# Altium PCB SlotCarControllerRev0.PcbDoc
Units mm, origin at the board's own origin, x right, y up, seen from the top; angles counter-clockwise.
Board outline 106.68 x 67.31 mm, 2 copper layers (Top Layer, Bottom Layer); 56 components, 63 nets, 209 pads, 24 vias.
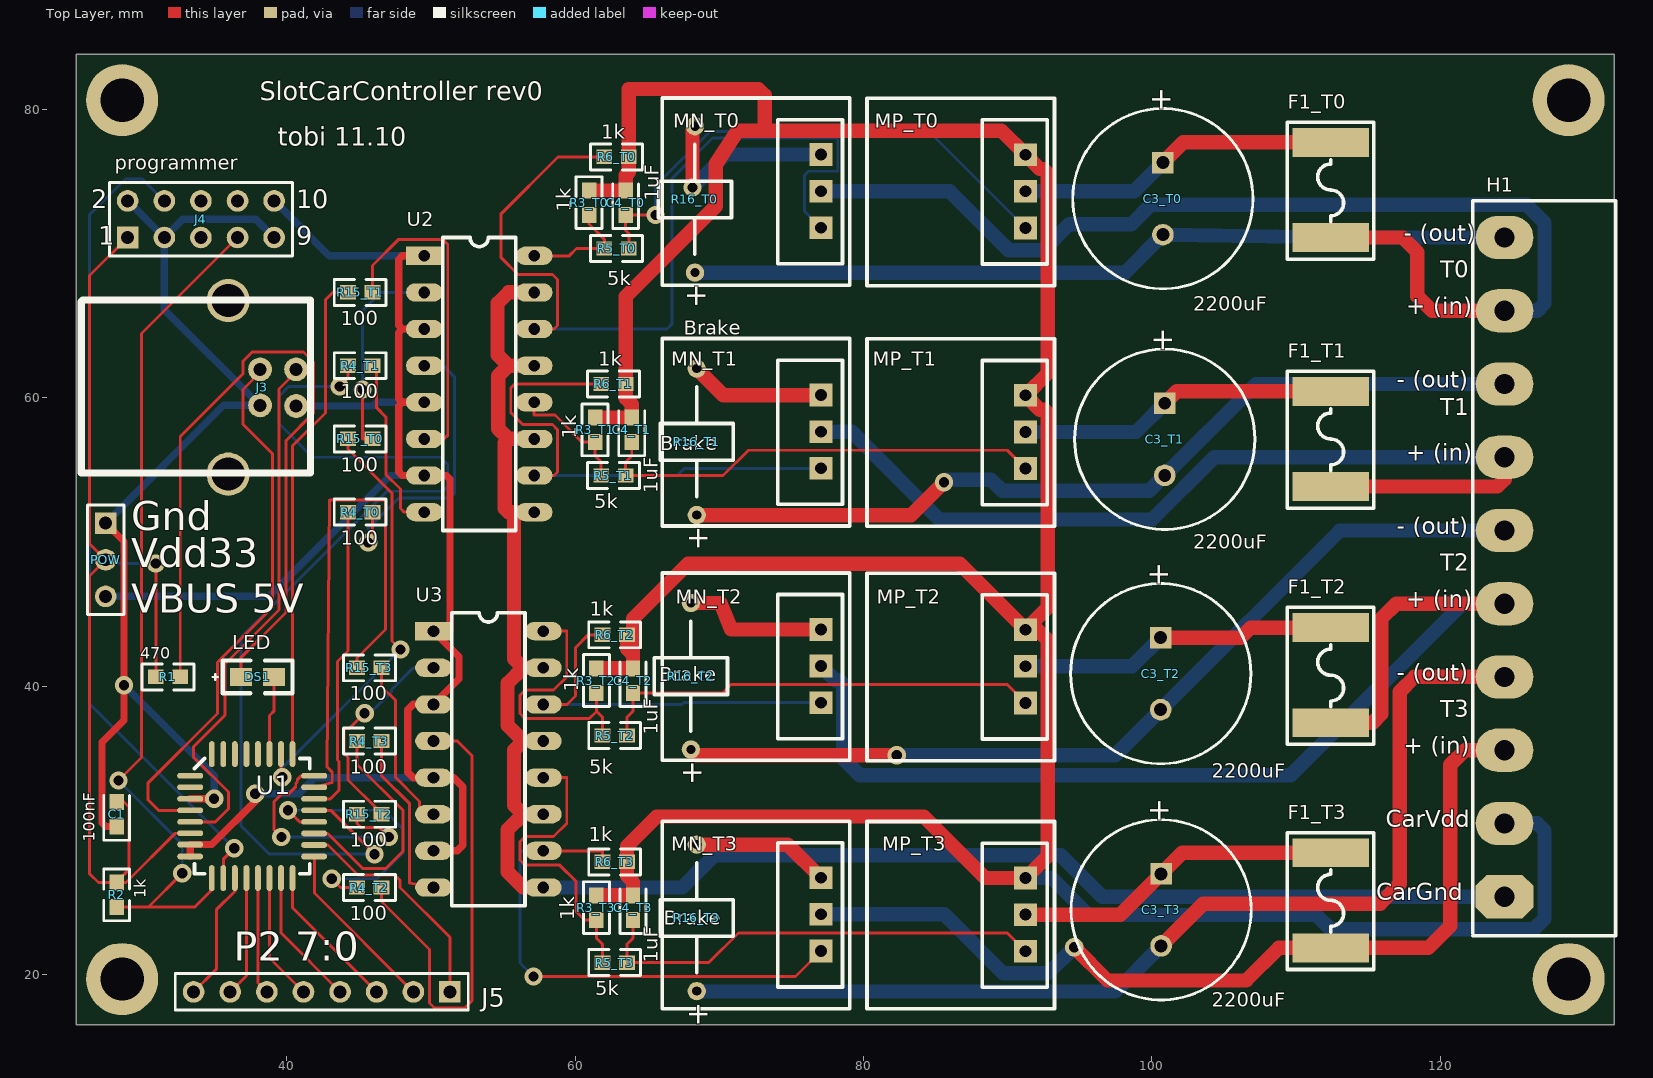
[diagram p0: Top Layer view]
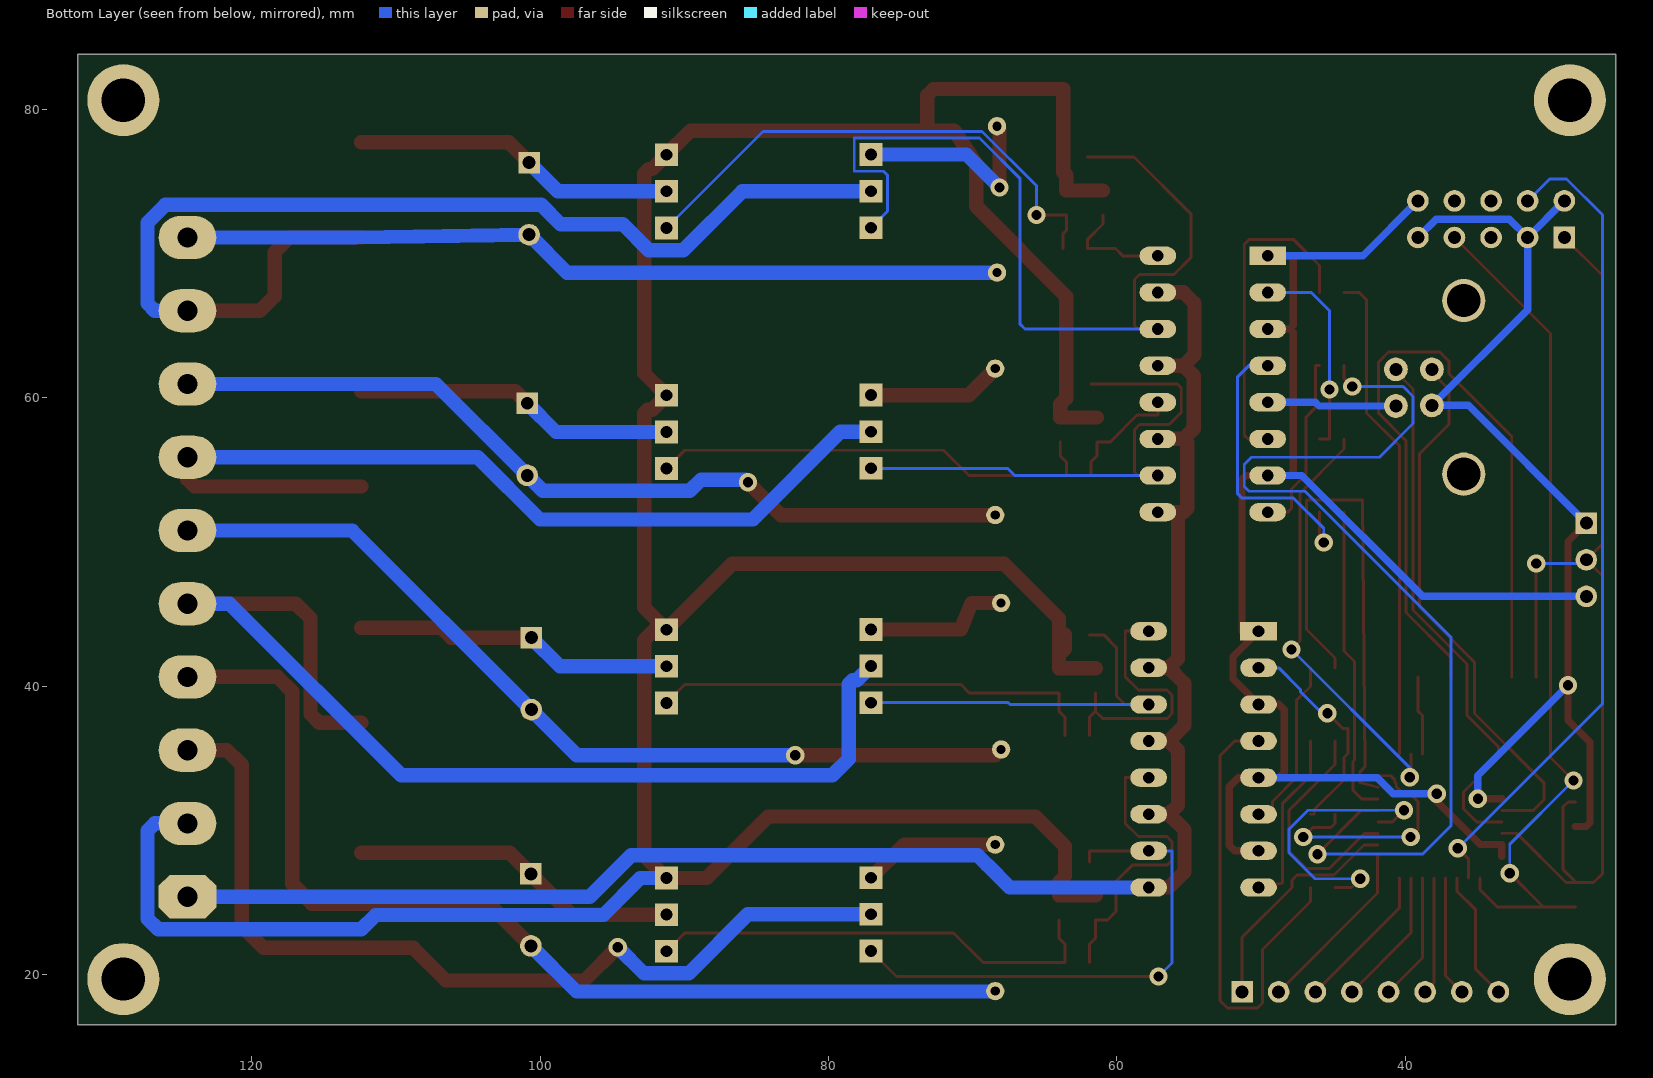
[diagram p1: Bottom Layer view, seen from below]

## Layer stack, top to bottom
Top Layer: signal copper 0.0356
Dielectric: dielectric 0.32, FR-4, Dk 4.8
Bottom Layer: signal copper 0.0356

## Board outline
25.4,16.51 25.4,83.82 132.08,83.82 132.08,16.51

## Design rules (kind name [scope] priority, off if disabled: settings)
Clearance [All] p1: gap=0.254
ComponentClearance ComponentClearance_1 [All vs (HasFootprint('TO220_HEATSINK'))] p1: gap=-999 collisioncheckmode=3 verticalgap=0.254 showdistances=TRUE
ComponentClearance [All] p2: gap=0.254 collisioncheckmode=3 verticalgap=2540 showdistances=TRUE
DiffPairsRouting "Schematic Differential Pairs Routing" [InNet('USBD_P')] p1: maxlimit=0.254 minlimit=0.254 mostfreqgap=0.254 maxuncoupledlength=12.7
DiffPairsRouting [All] p2: maxlimit=0.254 minlimit=0.254 mostfreqgap=0.254 maxuncoupledlength=12.7
Height [All] p1 off: minheight=0 maxheight=25.4 prefheight=12.7
HoleSize [All] p1: absolutevalues=TRUE maxlimit=3 minlimit=0.025 maxpercent=80.000 minpercent=20.000
PolygonConnect [All] p1: connectstyle=Relief reliefconductorwidth=0.254 reliefentries=4 polygonreliefangle="90 Angle"
RoomDefinition RoomDefinition_4 [InComponentClass('T3')] p1 off: confinementstyle=ConfineIn formatcopy=TRUE lockcomponents=FALSE outline 65.024,13.589 121.793,13.589 121.793,27.559 65.024,27.559
RoomDefinition RoomDefinition_3 [InComponentClass('T2') vs False] p2 off: confinementstyle=ConfineIn formatcopy=TRUE lockcomponents=FALSE outline 65.024,31.115 121.793,31.115 121.793,45.085 65.024,45.085
RoomDefinition RoomDefinition_2 [InComponentClass('T1') vs False] p3 off: confinementstyle=ConfineIn formatcopy=TRUE lockcomponents=FALSE outline 66.675,50.419 123.444,50.419 123.444,64.389 66.675,64.389
RoomDefinition RoomDefinition_1 [InComponentClass('T1') vs False] p4 off: confinementstyle=ConfineIn formatcopy=TRUE lockcomponents=FALSE outline 65.024,50.44 121.793,50.44 121.793,64.41 65.024,64.41
RoomDefinition [InComponentClass('T0') vs False] p5 off: confinementstyle=ConfineIn formatcopy=TRUE lockcomponents=FALSE outline 64.643,68.072 121.412,68.072 121.412,82.042 64.643,82.042
RoutingVias [All] p1: holewidth=0.711 width=1.27 viastyle="Through Hole" minholewidth=0.711 minwidth=1.27 maxholewidth=0.711 maxwidth=1.27
SMDNeckDown SMDNeckDown_2 [InNet('GND')] p1: percent=200.000
SMDNeckDown SMDNeckDown_1 [InNet('VBUS')] p2: percent=200.000
SMDNeckDown [All] p3 off: percent=80.000
SilkscreenOverComponentPads [All] p1: minsilkscreentomaskgap=0.254
SolderMaskExpansion [All] p1: expansion=0.102
TestPointUsage [All] p1: valid=0 allowmultiple=FALSE
Testpoint [All] p1: side=15 testpointundercomponent=TRUE minsize=1.016 maxsize=2.54 preferedsize=1.524 minholesize=0 maxholesize=1.016 preferedholesize=0.813 testpointgrid=0.025 style=1023 order=0123456789
Width track [(InNetClass('track'))] p1: maxlimit=2 minlimit=0.254 preferedwidth=1 // width of track side wires
Width "Schematic Width Constraint" [InNet('VBUS')] p2: maxlimit=1.524 minlimit=0.254 preferedwidth=0.508
Width "Schematic Width Constraint_1" [InNet('GND')] p3: maxlimit=1.524 minlimit=0.254 preferedwidth=0.508
Width [All] p4: maxlimit=0.254 minlimit=0.203 preferedwidth=0.254 toplayer_maxwidth=0.203 toplayer_prefwidth=0.203 bottomlayer_maxwidth=0.203 bottomlayer_prefwidth=0.203 minimp=50.000000 maximp=50.000000 favimp=50.000000
19 further rules are at their usual default settings.

## Classes and differential pairs
net class track: CARGND CARGND_T0 CARGND_T1 CARGND_T2 CARGND_T3 CARVDD NetC3_T0_1 NetC3_T1_1 NetC3_T2_1 NetC3_T3_1 NetMN_T0_3 NetMN_T1_3 NetMN_T2_3 NetMN_T3_3 TRACK+0 TRACK+1 TRACK+2 TRACK+3
component class SlotCarControllerRev0: C1 DS1 F? H1 J3 J4 J5 POW R1 R2 U1 U2 U3
component class T3: C3_T3 C4_T3 F1_T3 MN_T3 MP_T3 R3_T3 R4_T3 R5_T3 R6_T3 R15_T3 R16_T3
component class T1: C3_T1 C4_T1 F1_T1 MN_T1 MP_T1 R3_T1 R4_T1 R5_T1 R6_T1 R15_T1 R16_T1
component class T2: C3_T2 C4_T2 F1_T2 MN_T2 MP_T2 R3_T2 R4_T2 R5_T2 R6_T2 R15_T2 R16_T2
component class T0: C3_T0 C4_T0 F1_T0 MN_T0 MP_T0 R3_T0 R4_T0 R5_T0 R6_T0 R15_T0 R16_T0
channel class SlotCarChannel: T0 T1 T2 T3
differential pair USBD: +USBD_P -USBD_N

## Components (designator, comment, footprint, x,y, rotation, side; value= is the part's Value field where it differs from the comment)
C1 "100nF" CC1608-0603 28.194,31.115 r90 top
C3_T0 "2200uF" CAPPR5-12.5x35 100.762,73.812 r270 top (schematic designator C3)
C3_T1 "2200uF" CAPPR5-12.5x35 100.889,57.125 r270 top (schematic designator C3)
C3_T2 "2200uF" CAPPR5-12.5x35 100.609,40.869 r270 top (schematic designator C3)
C3_T3 "2200uF" CAPPR5-12.5x35 100.635,24.486 r270 top (schematic designator C3)
C4_T0 "1uF" CC1608-0603 63.5,73.533 r90 top (schematic designator C4)
C4_T1 "1uF" CC1608-0603 63.92,57.785 r90 top (schematic designator C4)
C4_T2 "1uF" CC1608-0603 64.008,40.386 r90 top (schematic designator C4)
C4_T3 "1uF" CC1608-0603 64.008,24.638 r90 top (schematic designator C4)
DS1 "LED" 0805LED 36.83,40.64 r0 top
F1_T0 "2A" 2920Littelfuse 112.395,71.12 r90 top (schematic designator F1)
F1_T1 "2A" 2920Littelfuse 112.395,53.848 r90 top (schematic designator F1)
F1_T2 "2A" 2920Littelfuse 112.395,37.465 r90 top (schematic designator F1)
F1_T3 "2A" 2920Littelfuse 112.395,21.844 r90 top (schematic designator F1)
H1 "Header 10H" SL508/10/90 124.46,25.4 r90 top
J3 "USB B" usb 40.64,61.976 r270 top
J4 "Debug" HDR2X5 28.956,71.12 r0 top
J5 "Port2" HDR1X8 51.308,18.796 r180 top
MN_T0 "7334" TO220_HEATSINK 77.043,71.797 r90 top (schematic designator MN)
MN_T1 "7334" TO220_HEATSINK 77.043,55.11 r90 top (schematic designator MN)
MN_T2 "7334" TO220_HEATSINK 77.043,38.854 r90 top (schematic designator MN)
MN_T3 "7334" TO220_HEATSINK 77.043,21.632 r90 top (schematic designator MN)
MP_T0 "MOSFET-P GDS" TO220_HEATSINK 91.237,71.78 r90 top (schematic designator MP)
MP_T1 "MOSFET-P GDS" TO220_HEATSINK 91.237,55.093 r90 top (schematic designator MP)
MP_T2 "MOSFET-P GDS" TO220_HEATSINK 91.237,38.837 r90 top (schematic designator MP)
MP_T3 "MOSFET-P GDS" TO220_HEATSINK 91.237,21.615 r90 top (schematic designator MP)
POW "POW" HDR1X3 27.432,51.308 r270 top
R1 "470" CR1608-0603 31.75,40.64 r0 top
R2 "1k" CR1608-0603 28.194,25.527 r270 top
R3_T0 "1k" CR1608-0603 60.96,73.533 r270 top (schematic designator R3)
R3_T1 "1k" CR1608-0603 61.38,57.785 r270 top (schematic designator R3)
R3_T2 "1k" CR1608-0603 61.468,40.386 r270 top (schematic designator R3)
R3_T3 "1k" CR1608-0603 61.468,24.638 r270 top (schematic designator R3)
R4_T0 "100" CR1608-0603 45.085,52.07 r0 top (schematic designator R4)
R4_T1 "100" CR1608-0603 45.085,62.23 r0 top (schematic designator R4)
R4_T2 "100" CR1608-0603 45.72,26.035 r0 top (schematic designator R4)
R4_T3 "100" CR1608-0603 45.72,36.195 r0 top (schematic designator R4)
R5_T0 "5k" CR1608-0603 62.865,70.358 r180 top (schematic designator R5)
R5_T1 "5k" CR1608-0603 62.65,54.61 r180 top (schematic designator R5)
R5_T2 "5k" CR1608-0603 62.738,36.576 r180 top (schematic designator R5)
R5_T3 "5k" CR1608-0603 62.738,20.828 r180 top (schematic designator R5)
R6_T0 "1k" CR1608-0603 62.865,76.708 r180 top (schematic designator R6)
R6_T1 "1k" CR1608-0603 62.65,60.96 r180 top (schematic designator R6)
R6_T2 "1k" CR1608-0603 62.738,43.561 r180 top (schematic designator R6)
R6_T3 "1k" CR1608-0603 62.738,27.813 r180 top (schematic designator R6)
R15_T0 "100" CR1608-0603 45.085,57.15 r0 top (schematic designator R15)
R15_T1 "100" CR1608-0603 45.085,67.31 r0 top (schematic designator R15)
R15_T2 "100" CR1608-0603 45.72,31.115 r0 top (schematic designator R15)
R15_T3 "100" CR1608-0603 45.72,41.275 r0 top (schematic designator R15)
R16_T0 "Brake" "Axial 0.4" 68.301,68.682 r90 top (schematic designator R16)
R16_T1 "Brake" "Axial 0.4" 68.428,51.867 r90 top (schematic designator R16)
R16_T2 "Brake" "Axial 0.4" 68.021,35.611 r90 top (schematic designator R16)
R16_T3 "Brake" "Axial 0.4" 68.428,18.847 r90 top (schematic designator R16)
U1 "C8051F320" TQFP32 37.592,30.988 r0 top
U2 "ACPL847" DIP16 49.53,69.85 r0 top
U3 "ACPL847" DIP16 50.165,43.815 r0 top

## Footprints (in the part's own frame and the unit in brackets; to place one, negate y for a bottom-side part, rotate by r counter-clockwise, add the part's x,y. Pads: shape width x height; smd on the part's side, far side on the other; paste and mask are expansions set on the pad)
0805LED [mil]
  rect 60x50 smd: +(0,0) -(90,0)
  silkscreen extent -79,-45 140,45
2920Littelfuse [mm] "SMD self resetting thermal fuse"
  rect 2x5.3 smd: 1(0,0) 2(6.6,0)
  silkscreen extent -1.5,-3 8,3
"Axial 0.4" [mm]
  round 1.27 hole 0.635: 1(0,0) 2(10.16,0)
  silkscreen extent 1.27,-2.54 8.89,2.54
CAPPR5-12.5x35 [mm] "Capacitor, Electrolytic, Radial; Body 12.5 x 35 mm (Dia.xH typ); Pin Spacing 5 mm (typ)"
  rect 1.5x1.5 hole 0.9: 1(-2.5,0)
  round 1.5 hole 0.9: 2(2.5,0)
  silkscreen extent -6.25,-6.25 6.25,6.25
CC1608-0603 [mm]
  rect 1.1x1 smd: 1(-0.85,0) 2(0.85,0)
  silkscreen extent -1.8,-0.9 1.3,0.9
CR1608-0603 [mm]
  rect 1.1x1 smd: 1(-0.85,0) 2(0.85,0)
  silkscreen extent -1.8,-0.9 1.8,0.9
DIP16 [mil]
  rect 100x50 hole 32: 1(0,0)
  oval 100x50 hole 32: 2(0,-100) 3(0,-200) 4(0,-300) 5(0,-400) 6(0,-500) 7(0,-600) 8(0,-700) 9(300,-700) 10(300,-600) 11(300,-500) 12(300,-400) 13(300,-300) 14(300,-200) 15(300,-100) 16(300,0)
  silkscreen extent 50,-750 250,50
HDR1X3 [mm] "Connector; Header; 3 Position"
  rect 1.5x1.5 hole 0.9: 1(0,0)
  round 1.5 hole 0.9: 2(2.54,0) 3(5.08,0)
  silkscreen extent -1.27,-1.27 6.35,1.27
HDR1X8 [mm] "Connector; Header; 8 Position"
  rect 1.5x1.5 hole 0.9: 1(0,0)
  round 1.5 hole 0.9: 2(2.54,0) 3(5.08,0) 4(7.62,0) 5(10.16,0) 6(12.7,0) 7(15.24,0) 8(17.78,0)
  silkscreen extent -1.27,-1.27 19.05,1.27
HDR2X5 [mm] "Connector; Header; 5x2 Position"
  rect 1.5x1.5 hole 0.9: 1(0,0)
  round 1.5 hole 0.9: 2(0,2.54) 3(2.54,0) 4(2.54,2.54) 5(5.08,0) 6(5.08,2.54) 7(7.62,0) 8(7.62,2.54) 9(10.16,0) 10(10.16,2.54)
  silkscreen extent -1.27,-1.27 11.43,3.81
SL508/10/90 [mm] "Weidmuller 10 pin right angle header"
  oct 3x4 hole 1.4: 1(0,0)
  oval 3x4 hole 1.4: 2(5.08,0) 3(10.16,0) 4(15.24,0) 5(20.32,0) 6(25.4,0) 7(30.48,0) 8(35.56,0) 9(40.64,0) 10(45.72,0)
  silkscreen extent -2.7,-7.7 48.26,2.2
TO220_HEATSINK [mil]
  rect 62x62 hole 32: 1(0,0) 2(100,0) 3(200,0)
  silkscreen extent -157,-79 354,433
TQFP32 [mm]
  oval 1.8x0.4 smd: 1(-4.3,2.8) 2(-4.3,2) 3(-4.3,1.2) 4(-4.3,0.4) 5(-4.3,-0.4) 6(-4.3,-1.188) 7(-4.3,-1.975) 8(-4.3,-2.8) 17(4.3,-2.8) 18(4.3,-2) 19(4.3,-1.2) 20(4.3,-0.4) 21(4.3,0.4) 22(4.3,1.2) 23(4.3,2) 24(4.3,2.8)
  oval 0.4x1.8 smd: 9(-2.8,-4.3) 10(-2,-4.3) 11(-1.2,-4.3) 12(-0.4,-4.3) 13(0.4,-4.3) 14(1.2,-4.3) 15(2,-4.3) 16(2.8,-4.3) 25(2.8,4.3) 26(2,4.3) 27(1.2,4.3) 28(0.4,4.3) 29(-0.4,4.3) 30(-1.2,4.3) 31(-2,4.3) 32(-2.8,4.3)
  silkscreen extent -4,-4 4,4
usb [mm]
  round 1.651 hole 0.9: 1(2.54,0) 2(0,0) 3(0,-2.5) 4(2.5,-2.5)
  round 3 hole 2.3: 5(-4.77,-4.71) 5(7.27,-4.71)
  silkscreen extent -4.8,-14.9 7.2,1

## Part data
C1: library part CAPCHIP
C3_T0 C3_T1 C3_T2 C3_T3: library part "Cap Pol1", "Polarized Capacitor (Radial)"
C4_T0 C4_T1 C4_T2 C4_T3: library part "Cap Semi", "Capacitor (Semiconductor SIM Model)"
DS1: "LED, SMT 3mm by 1.5mm"
F1_T0 F1_T1 F1_T2 F1_T3: library part "Fuse 2", "Fuse"
H1: "Header, 10-Pin, Right Angle"
J3: library part USB, "USB TypB"
J4: library part "Header 5X2", "Header, 5-Pin, Dual row"
J5: library part "Header 8", "Header, 8-Pin"
MN_T0 MN_T1 MN_T2 MN_T3: library part MOSFET-N-GDS, "N-Channel MOSFET"
MP_T0 MP_T1 MP_T2 MP_T3: library part MOSFET-P-GDS, "P-Channel MOSFET"
POW: library part "Header 3", "Header, 3-Pin"
R1 R2: library part RES1
R3_T0 R3_T1 R3_T2 R3_T3 R4_T0 R4_T1 R4_T2 R4_T3 R5_T0 R5_T1 R5_T2 R5_T3 R6_T0 R6_T1 R6_T2 R6_T3 R15_T0 R15_T1 R15_T2 R15_T3: library part "Res Semi", "Semiconductor Resistor"
R16_T0 R16_T1 R16_T2 R16_T3: library part Res2, "Resistor"
U1: "Silicon Labs USB Microcontroller"
U2 U3: library part Opto16, "16-Pin 4-channel Phototransistor Optocoupler"

## Free pads (board coordinates)
  round 5 hole 3: 0(28.575,19.685) 1(28.575,80.645) 2(128.905,80.645) 3(128.905,19.685)

## Via types
v1: diameter 1.27, hole 0.711, Top Layer to Bottom Layer, 24 vias

## Nets (pads, with @x,y where several pads share a name; then routed paths per layer and width w, separated by ;. In a path a pad name is that pad's centre, name@x,y a point inside that pad or via, vN(x,y) a via of type N, cw(c..) or ccw(c..) an arc to the next point about the centre after c; other vN are vias at no path point)
/RST/C2CK: J4.7 R2.2 U1.9 | length 62.8
  Top Layer w0.203: v1(28.321,33.452) 29.921,35.052 29.921,64.465 J4.7 ; v1(32.741,27.026) 30.392,24.677 ; U1.9 34.792,25.857 33.612,24.677 30.392,24.677 ; 30.392,24.677 R2.2 30.392,24.677
  Bottom Layer w0.203: v1(28.321,33.452) 32.741,29.032 v1(32.741,27.026)
C2D: J4.4 U1.10 | length 57.3
  Top Layer w0.203: U1.10 35.592,27.997 v1(36.345,28.75)
  Bottom Layer w0.203: J4.4 29.972,75.184 28.804,75.184 26.314,72.695 26.314,38.78 v1(36.345,28.75)
CARGND: H1.1 U2.9 U2.11 U2.13 U2.15 U3.9 U3.11 U3.13 U3.15 | length 128.2
  Top Layer w1: U2.11 55.372,57.15 ; U2.13 55.372,62.23 ; U2.15 55.372,67.31 54.61,66.548 54.61,62.992 55.372,62.23 ; U3.9 56.388,26.035 55.304,27.119 55.304,30.031 56.388,31.115 ; U3.11 56.388,31.115 ; U3.13 56.388,36.195 ; U3.15 56.388,41.275 ; 55.372,57.15 55.118,56.896 55.118,52.324 55.372,52.07 55.753,52.07 ; 55.372,57.15 54.669,57.853 54.669,61.527 55.372,62.23 ; 55.753,52.07 U2.9 55.753,52.07 ; 55.753,52.07 55.753,41.91 56.388,41.275 ; 56.388,31.115 55.753,31.75 55.753,35.56 56.388,36.195 ; 56.388,36.195 55.304,37.279 55.304,40.191 56.388,41.275
  Bottom Layer w1: U3.9 67.412,26.035 68.994,27.618 69.003,27.618 69.655,28.27 93.675,28.27 96.545,25.4 H1.1
CARGND_T0: C3_T0.2 H1.10 R16_T0.1 | length 57.3
  Bottom Layer w1: R16_T0.1 98.131,68.682 C3_T0.2 112.816,71.12 H1.10
CARGND_T1: C3_T1.2 H1.8 R16_T1.1 | length 60.5
  Top Layer w1: R16_T1.1 83.287,51.867 v1(85.573,54.153)
  Bottom Layer w1: v1(85.573,54.153) 85.75,54.331 88.824,54.331 89.611,53.543 99.807,53.543 C3_T1.2 107.224,60.96 H1.8
CARGND_T2: C3_T2.2 H1.6 R16_T2.1 | length 63.1
  Top Layer w1: R16_T2.1 68.428,35.204 v1(82.296,35.204)
  Bottom Layer w1: v1(82.296,35.204) 97.445,35.204 C3_T2.2 113.041,50.8 H1.6
CARGND_T3: C3_T3.2 H1.4 R16_T3.1 | length 72.9
  Top Layer w1: C3_T3.2 103.567,24.917 115.824,24.917 117.196,26.289 117.196,39.624 118.212,40.64 H1.4
  Bottom Layer w1: R16_T3.1 68.454,18.82 73.661,18.82 97.469,18.82 C3_T3.2
CARVDD: C4_T0.2 C4_T1.2 C4_T2.2 C4_T3.2 H1.2 MP_T0.3 MP_T1.3 MP_T2.3 MP_T3.3 R3_T0.1 R3_T1.1 R3_T2.1 R3_T3.1 R6_T0.1 R6_T1.1 R6_T2.1 R6_T3.1 | length 245.3
  Top Layer w1: R3_T0.1 C4_T0.2 63.5,75.438 63.715,75.653 R6_T0.1 63.715,81.419 72.708,81.419 73.152,80.975 73.152,78.537 ; R3_T1.1 C4_T1.2 63.92,59.563 63.5,59.983 R6_T1.1 63.5,67.031 69.748,73.279 69.748,76.2 71.272,78.537 73.152,78.537 ; R3_T3.1 C4_T3.2 64.008,26.416 63.588,26.836 R6_T3.1 63.588,28.892 65.659,30.963 84.176,30.963 88.443,26.695 MP_T3.3 92.786,28.245 92.786,43.18 92.05,43.917 MP_T2.3 ; R3_T2.1 C4_T2.2 ; R6_T2.1 63.588,42.584 64.008,42.164 ; C4_T2.2 64.008,42.164 ; C4_T2.2 64.008,42.164 ; 64.008,42.164 64.008,44.679 67.818,48.489 86.665,48.489 MP_T2.3 ; 73.152,78.537 89.56,78.537 MP_T0.3 92.227,75.87 92.456,75.87 92.786,75.54 92.786,61.722 MP_T1.3 92.227,59.182 92.532,59.182 92.786,58.928 92.786,45.466 MP_T2.3
  Bottom Layer w1: MP_T3.3 93.04,26.695 95.606,24.13 111.404,24.13 112.395,23.139 126.492,23.139 127.229,23.876 127.229,29.972 126.721,30.48 H1.2
GND: C1.1 J3.4 J4.2 J4.3 J4.9 POW.1 U1.3 | length 85.9
  Top Layer w0.508: POW.1 28.702,50.038 ; C1.1 27.432,30.265 27.178,30.519 27.178,36.119 28.702,37.643 v1(28.702,40.056) ; U1.3 v1(34.95,32.188) ; v1(28.702,40.056) 28.702,50.038 ; v1(28.702,40.056) 28.702,50.038
  Bottom Layer w0.508: POW.1 35.6,59.476 J3.4 31.496,66.12 J4.3 ; v1(28.702,40.056) 34.95,33.807 v1(34.95,32.188) ; J4.2 J4.3 ; J4.9 37.846,72.39 32.766,72.39 J4.3
LED+: DS1.+ R1.2 | length 53
  Top Layer w0.203: R1.2 32.6,57.314 36.957,61.671 36.957,62.535 37.592,63.17 41.148,63.17 41.834,62.484 41.834,58.928 39.929,57.023 39.929,45.11 36.83,42.012 DS1.+
LED-: DS1.- U1.27 | length 5.5
  Top Layer w0.203: U1.27 38.792,37.973 39.116,38.297 DS1.-
NetC3_T0_1: C3_T0.1 F1_T0.2 MP_T0.2 | length 22.6
  Top Layer w1: C3_T0.1 102.169,77.72 F1_T0.2
  Bottom Layer w1: MP_T0.2 98.77,74.32 C3_T0.1
NetC3_T1_1: C3_T1.1 F1_T1.2 MP_T1.2 | length 22.3
  Top Layer w1: C3_T1.1 101.712,60.448 F1_T1.2
  Bottom Layer w1: MP_T1.2 98.897,57.633 C3_T1.1
NetC3_T2_1: C3_T2.1 F1_T2.2 MP_T2.2 | length 22.3
  Top Layer w1: C3_T2.1 106.147,43.369 106.843,44.065 F1_T2.2
  Bottom Layer w1: MP_T2.2 98.617,41.377 C3_T2.1
NetC3_T3_1: C3_T3.1 F1_T3.2 MP_T3.2 | length 22.9
  Top Layer w1: MP_T3.2 97.805,24.155 C3_T3.1 102.093,28.444 F1_T3.2
NetC4_T0_1: C4_T0.1 MP_T0.1 R5_T0.1 | length 36.5
  Top Layer w0.203: R5_T0.1 63.715,71.399 63.5,71.614 C4_T0.1 v1(65.571,72.683)
  Bottom Layer w0.203: v1(65.571,72.683) 65.571,74.711 69.338,78.478 84.54,78.478 MP_T0.1
NetC4_T1_1: C4_T1.1 MP_T1.1 R5_T1.1 | length 31.5
  Top Layer w0.203: C4_T1.1 63.92,55.97 63.5,55.55 R5_T1.1 70.256,54.61 72.009,56.363 89.967,56.363 MP_T1.1
NetC4_T2_1: C4_T2.1 MP_T2.1 R5_T2.1 | length 31.1
  Top Layer w0.203: R5_T2.1 63.588,37.846 64.008,38.266 C4_T2.1 70.231,39.536 70.802,40.107 89.967,40.107 MP_T2.1
NetC4_T3_1: C4_T3.1 MP_T3.1 R5_T3.1 | length 32.2
  Top Layer w0.203: C4_T3.1 64.008,22.518 63.588,22.098 R5_T3.1 69.266,20.828 71.323,22.885 89.967,22.885 MP_T3.1
NetMN_T0_1: MN_T0.1 R6_T0.2 U2.14 | length 62.6
  Top Layer w0.203: U2.14 58.522,64.77 58.776,65.024 58.776,68.199 58.42,68.555 56.032,68.555 54.864,69.723 54.864,72.771 58.801,76.708 R6_T0.2
  Bottom Layer w0.203: U2.14 66.37,64.77 66.7,65.1 66.7,75.194 69.527,78.02 78.207,78.02 78.207,75.717 76.175,75.717 75.895,75.438 75.895,72.945 MN_T0.1
NetMN_T0_3: MN_T0.3 R16_T0.2 | length 14.2
  Top Layer w1: v1(68.135,74.587) 68.135,78.676 R16_T0.2
  Bottom Layer w1: v1(68.135,74.587) 70.426,76.877 MN_T0.3
NetMN_T1_1: MN_T1.1 R6_T1.2 U2.10 | length 36.6
  Top Layer w0.203: U2.10 58.522,54.61 58.776,54.864 58.776,57.785 58.42,58.141 56.363,58.141 55.524,58.979 55.524,60.681 55.804,60.96 R6_T1.2
  Bottom Layer w0.203: U2.10 67.081,54.61 67.581,55.11 MN_T1.1
NetMN_T1_3: MN_T1.3 R16_T1.2 | length 9.4
  Top Layer w1: R16_T1.2 70.265,60.19 MN_T1.3
NetMN_T2_1: MN_T2.1 R6_T2.2 U3.14 | length 27.4
  Top Layer w0.203: U3.14 59.436,38.735 60.02,39.319 60.02,42.672 60.909,43.561 R6_T2.2
  Bottom Layer w0.203: U3.14 67.412,38.735 67.53,38.854 MN_T2.1
NetMN_T2_3: MN_T2.3 R16_T2.2 | length 10.2
  Top Layer w1: R16_T2.2 70.071,45.771 70.832,43.934 MN_T2.3
NetMN_T3_1: MN_T3.1 R6_T3.2 U3.10 | length 36.3
  Top Layer w0.203: v1(57.099,19.863) 75.273,19.863 MN_T3.1 ; U3.10 61.888,28.575 R6_T3.2
  Bottom Layer w0.203: v1(57.099,19.863) 56.159,20.803 56.159,28.575 U3.10
NetMN_T3_3: MN_T3.3 R16_T3.2 | length 9.6
  Top Layer w1: R16_T3.2 74.748,29.007 MN_T3.3
NetR3_T0_2: R3_T0.2 R5_T0.2 U2.16 | length 7.8
  Top Layer w0.203: U2.16 59.588,69.85 60.096,70.358 R5_T0.2 62.015,70.993 60.96,72.048 R3_T0.2
NetR3_T1_2: R3_T1.2 R5_T1.2 U2.12 | length 8.4
  Top Layer w0.203: U2.12 57.15,58.801 58.586,58.801 60.452,56.935 R3_T1.2 61.38,55.97 61.8,55.55 R5_T1.2
NetR3_T2_2: R3_T2.2 R5_T2.2 U3.16 | length 19.9
  Top Layer w0.203: U3.16 59.411,43.815 59.411,40.64 58.496,39.726 56.515,39.726 56.159,39.37 56.159,38.1 56.515,37.744 60.96,37.744 61.468,38.252 61.468,38.266 ; R5_T2.2 61.888,37.846 61.468,38.266 ; 61.468,38.266 R3_T2.2 61.468,38.266
NetR3_T3_2: R3_T3.2 R5_T3.2 U3.12 | length 21.2
  Top Layer w0.203: U3.12 59.411,33.655 59.411,30.48 58.496,29.566 56.515,29.566 56.159,29.21 56.159,27.94 56.515,27.584 58.928,27.584 60.046,26.467 60.046,24.384 60.642,23.788 R3_T3.2 61.468,22.518 61.888,22.098 R5_T3.2
NetR4_T0_2: R4_T0.2 U2.4 | length 20.7
  Top Layer w0.203: v1(45.644,49.972) 45.935,50.263 R4_T0.2
  Bottom Layer w0.203: v1(45.644,49.972) 45.644,50.952 47.752,53.061 51.333,53.061 51.613,53.34 51.613,61.468 50.851,62.23 U2.4
NetR4_T1_2: R4_T1.2 U2.8 | length 12.6
  Top Layer w0.203: R4_T1.2 46.228,62.23 46.228,59.309 46.863,58.674 46.863,54.686 47.879,53.67 47.879,52.324 48.133,52.07 U2.8
NetR4_T2_2: R4_T2.2 U3.4 | length 32.8
  Top Layer w0.203: R4_T2.2 46.57,25.058 49.886,21.742 49.886,18.034 50.241,17.678 52.324,17.678 52.832,18.186 52.832,35.179 51.816,36.195 U3.4
NetR4_T3_2: R4_T3.2 U3.8 | length 12.3
  Top Layer w0.203: R4_T3.2 46.57,33.791 48.514,31.847 48.514,26.353 U3.8
NetR15_T0_2: R15_T0.2 U2.2 | length 14.4
  Top Layer w0.203: v1(45.237,60.579) 45.237,57.15 R15_T0.2
  Bottom Layer w0.203: v1(45.237,60.579) 45.237,66.04 46.507,67.31 U2.2
NetR15_T1_2: R15_T1.2 U2.6 | length 23
  Top Layer w0.203: R15_T1.2 45.935,69.176 47.752,70.993 50.8,70.993 51.156,70.637 51.156,57.404 50.902,57.15 U2.6
NetR15_T2_2: R15_T2.2 U3.2 | length 15.2
  Top Layer w0.203: v1(45.39,38.125) 44.323,37.059 43.964,37.059 43.964,35.331 44.247,35.049 44.247,33.499 46.301,31.445 46.301,31.115 R15_T2.2
  Bottom Layer w0.203: v1(45.39,38.125) 45.771,38.125 47.269,39.624 47.269,39.776 48.768,41.275 U3.2
NetR15_T3_2: R15_T3.2 U3.6 | length 12.2
  Top Layer w0.203: R15_T3.2 46.57,39.98 47.523,39.026 47.523,33.68 49.2,32.003 49.2,31.115 U3.6
P20: J5.1 U1.18 | length 16.2
  Top Layer w0.203: U1.18 42.843,28.988 44.933,26.899 47.498,26.899 47.854,26.543 47.854,26.035 51.308,22.581 J5.1
P21: J5.2 U1.17 | length 12.3
  Top Layer w0.203: U1.17 41.91,28.188 41.91,25.654 J5.2
P22: J5.3 U1.16 | length 10.3
  Top Layer w0.203: U1.16 40.392,24.632 J5.3
P23: J5.4 U1.15 | length 9.6
  Top Layer w0.203: U1.15 39.592,22.892 J5.4
P24: J5.5 U1.14 | length 8.9
  Top Layer w0.203: U1.14 38.792,21.152 J5.5
P25: J5.6 U1.13 | length 8.1
  Top Layer w0.203: U1.13 37.992,19.412 J5.6
P26: J5.7 U1.12 | length 8.4
  Top Layer w0.203: J5.7 37.192,19.92 U1.12
P27: J5.8 U1.11 | length 9.1
  Top Layer w0.203: J5.8 35.103,20.371 35.103,24.486 36.392,25.775 U1.11
S0: R15_T0.1 U1.26 | length 30
  Top Layer w0.203: U1.26 39.592,33.763 v1(39.675,33.68) ; R15_T0.1 44.235,56.451 47.298,53.388 47.298,43.126 v1(47.879,42.545)
  Bottom Layer w0.203: v1(39.675,33.68) 39.675,34.341 v1(47.879,42.545)
S1: R15_T1.1 U1.25 | length 34.2
  Top Layer w0.203: U1.25 40.392,56.673 42.672,58.953 42.672,66.802 43.18,67.31 R15_T1.1
S2: R15_T2.1 U1.24 | length 17.1
  Top Layer w0.203: v1(39.617,29.54) 39.091,30.067 39.091,31.972 39.624,32.505 40.1,32.505 40.615,33.02 40.615,33.249 40.716,33.35 40.716,33.509 40.996,33.788 U1.24 ; R15_T2.1 44.87,30.48 45.149,30.201 46.406,30.201 v1(47.066,29.54)
  Bottom Layer w0.203: v1(39.617,29.54) v1(47.066,29.54)
S3: R15_T3.1 U1.23 | length 37.4
  Top Layer w0.203: U1.23 43.148,33.308 43.148,34.036 42.774,34.41 42.951,52.926 46.841,52.926 46.841,43.931 44.87,41.961 R15_T3.1
S4: R4_T0.1 U1.22 | length 21.6
  Top Layer w0.203: U1.22 43.018,32.188 43.605,32.775 43.605,34.784 43.507,34.882 43.507,41.716 44.235,42.443 R4_T0.1
S5: R4_T1.1 U1.21 | length 69.8
  Top Layer w0.203: U1.21 43.034,31.388 v1(46.076,28.346) ; v1(43.663,60.782) 44.235,61.355 R4_T1.1
  Bottom Layer w0.203: v1(43.663,60.782) 40.132,60.782 39.446,60.096 39.446,58.217 41.783,55.88 50.648,55.88 51.156,55.372 51.156,53.848 50.825,53.518 46.939,53.518 36.805,43.383 36.805,30.328 38.786,28.346 v1(46.076,28.346)
S6: R4_T2.1 U1.20 | length 20
  Top Layer w0.203: v1(40.081,31.394) 40.888,30.588 U1.20 ; v1(43.104,26.645) 43.713,26.035 R4_T2.1
  Bottom Layer w0.203: v1(40.081,31.394) 46.736,31.394 48.057,30.074 48.057,28.448 46.253,26.645 v1(43.104,26.645)
S7: R4_T3.1 U1.19 | length 16.6
  Top Layer w0.203: U1.19 42.831,29.788 45.263,27.356 46.863,27.356 48.057,28.55 48.057,31.389 44.87,34.576 R4_T3.1
TRACK+0: F1_T0.1 H1.9 MN_T0.2 | length 78.2
  Top Layer w1: F1_T0.1 117.399,71.12 118.415,70.104 118.415,67.056 119.431,66.04 H1.9
  Bottom Layer w1: MN_T0.2 85.962,74.337 90.06,70.239 92.456,70.239 94.251,72.034 98.577,72.034 99.924,73.381 125.984,73.381 127.229,72.136 127.229,66.548 126.721,66.04 H1.9
TRACK+1: F1_T1.1 H1.7 MN_T1.2 | length 65.5
  Top Layer w1: F1_T1.1 123.952,53.848 124.46,54.356 H1.7
  Bottom Layer w1: MN_T1.2 79.172,57.65 85.259,51.562 100,51.562 104.318,55.88 H1.7
TRACK+2: F1_T2.1 H1.5 MN_T2.2 | length 77.9
  Top Layer w1: F1_T2.1 115.316,37.465 115.926,38.075 115.926,44.704 116.942,45.72 H1.5
  Bottom Layer w1: MN_T2.2 78.025,40.411 78.308,40.411 78.588,40.132 78.588,34.95 79.723,33.815 109.634,33.815 121.539,45.72 H1.5
TRACK+3: F1_T3.1 H1.3 MN_T3.2 | length 64
  Top Layer w1: v1(94.607,21.895) 96.918,19.583 106.528,19.583 108.788,21.844 F1_T3.1 119.177,21.844 120.701,23.368 120.701,34.544 121.717,35.56 H1.3
  Bottom Layer w1: MN_T3.2 85.589,24.172 89.687,20.074 92.786,20.074 v1(94.607,21.895)
USBD_N: J3.2 U1.5 | length 37.5
  Top Layer w0.203: U1.5 35.033,30.588 35.941,31.496 35.941,32.653 33.528,35.066 33.528,35.802 35.712,37.987 35.712,41.543 39.459,45.289 39.459,60.617 40.64,61.798 J3.2
USBD_P: J3.3 U1.4 | length 38
  Top Layer w0.203: U1.4 31.092,31.388 30.378,32.102 30.378,33.299 35.179,38.1 35.179,41.656 38.989,45.466 38.989,56.134 36.959,58.164 36.959,60.581 38.14,61.762 J3.3
VBUS: J3.1 J4.10 POW.3 U1.7 U1.8 U2.1 U2.3 U2.5 U2.7 U3.1 U3.3 U3.5 U3.7 | length 125.3
  Top Layer w0.508: U1.8 U1.7 34.798,29.013 37.811,32.026 v1(37.811,32.537) ; U2.5 48.006,59.69 ; U2.3 48.006,64.77 ; U2.1 48.006,69.85 47.752,69.596 47.752,65.024 48.006,64.77 ; U3.7 51.817,28.575 52.198,28.956 52.198,33.02 51.563,33.655 U3.5 48.768,33.655 48.387,34.036 48.387,38.354 48.768,38.735 U3.3 51.943,40.513 51.943,42.037 U3.1 51.308,43.815 51.308,54.356 51.054,54.61 U2.7 48.006,54.61 47.752,54.864 47.752,59.436 48.006,59.69 ; 48.006,59.69 47.752,59.944 47.752,64.516 48.006,64.77
  Bottom Layer w0.508: POW.3 38.786,46.228 47.168,54.61 U2.7 ; v1(37.811,32.537) 40.818,32.537 41.935,33.655 U3.5 ; J4.10 42.926,69.85 U2.1 ; J3.1 45.974,59.436 46.228,59.69 U2.5
VDD33: C1.2 J4.1 POW.2 R1.1 R2.1 U1.6 | length 72.9
  Top Layer w0.203: C1.2 28.702,31.965 29.058,31.609 29.058,27.309 28.194,26.445 R2.1 ; J4.1 26.314,68.478 26.314,49.886 POW.2 26.314,47.65 26.314,26.987 26.924,26.377 R2.1 ; R1.1 30.912,40.64 v1(30.912,48.514) ; U1.6 32.258,29.8 28.835,26.377 R2.1
  Bottom Layer w0.203: POW.2 27.686,48.514 v1(30.912,48.514)
pads on no net: J3.5 J4.5 J4.6 J4.8 U1.1 U1.2 U1.28 U1.29 U1.30 U1.31 U1.32

## Silkscreen, mask and mechanical layers (free items; w line width, h text height)
Top Overlay:
  text "SlotCarController rev0" at 38.1,80.645 h1.3
  text "tobi 11.10" at 39.37,77.47 h1.3
  text "programmer" at 28.067,75.819 h1
  text "- (out)" at 117.475,70.485 h2
  text "T0" at 120.015,67.945 h2
  text "+ (in)" at 117.653,65.405 h2
  text "- (out)" at 116.966,60.325 h2
  text "T1" at 120.015,58.42 h2
  text "+ (in)" at 117.653,55.245 h2
  text "Gnd" at 29.21,50.8 h2
  text "- (out)" at 116.966,50.165 h2
  text "Vdd33" at 29.21,48.26 h2
  text "T2" at 120.015,47.625 h2
  text "VBUS 5V" at 29.21,45.085 h2
  text "+ (in)" at 117.653,45.085 h2
  text "- (out)" at 116.966,40.005 h2
  text "T3" at 120.015,37.465 h2
  text "+ (in)" at 117.475,34.925 h2
  text "CarVdd" at 116.205,29.845 h2
  text "CarGnd" at 115.57,24.765 h2
  text "P2 7:0" at 36.322,20.955 h2
  text "G" at -96.52,-13.335 h1
  text "G" at -100.838,-35.941 h1
  text "3" at -98.298,-35.941 h1
  text "5" at -95.758,-35.941 h1

## Dimensions
25.4,12.7 to 132.08,15.24 on Mechanical 1
21.59,16.51 to 20.32,83.82 on Mechanical 1

## Text inside footprints (layer, text, board x,y; h text height)
C3_T0: Top Overlay "+" at 100.012,81.537 h1.5 r270
C3_T1: Top Overlay "+" at 100.139,64.85 h1.5 r270
C3_T2: Top Overlay "+" at 99.859,48.594 h1.5 r270
C3_T3: Top Overlay "+" at 99.885,32.211 h1.5 r270
J4: Top Overlay "2" at 26.416,73.152 h1.3; Top Overlay "1" at 26.924,70.612 h1.3; Top Overlay "9" at 40.64,70.612 h1.3; Top Overlay "10" at 40.64,73.152 h1.3
R16_T0: Top Overlay "+" at 69.051,66.197 h1.5 r90
R16_T1: Top Overlay "+" at 69.178,49.382 h1.5 r90
R16_T2: Top Overlay "+" at 68.771,33.126 h1.5 r90
R16_T3: Top Overlay "+" at 69.178,16.362 h1.5 r90